# Altium PCB riskybirdv3.PcbDoc
Units mm, origin at the board's own origin, x right, y up, seen from the top; angles counter-clockwise.
Board outline 152.4 x 101.6 mm, 4 copper layers (In2.Cu, F.Cu, B.Cu, In1.Cu); 183 components, 0 nets, 865 pads, 0 vias.
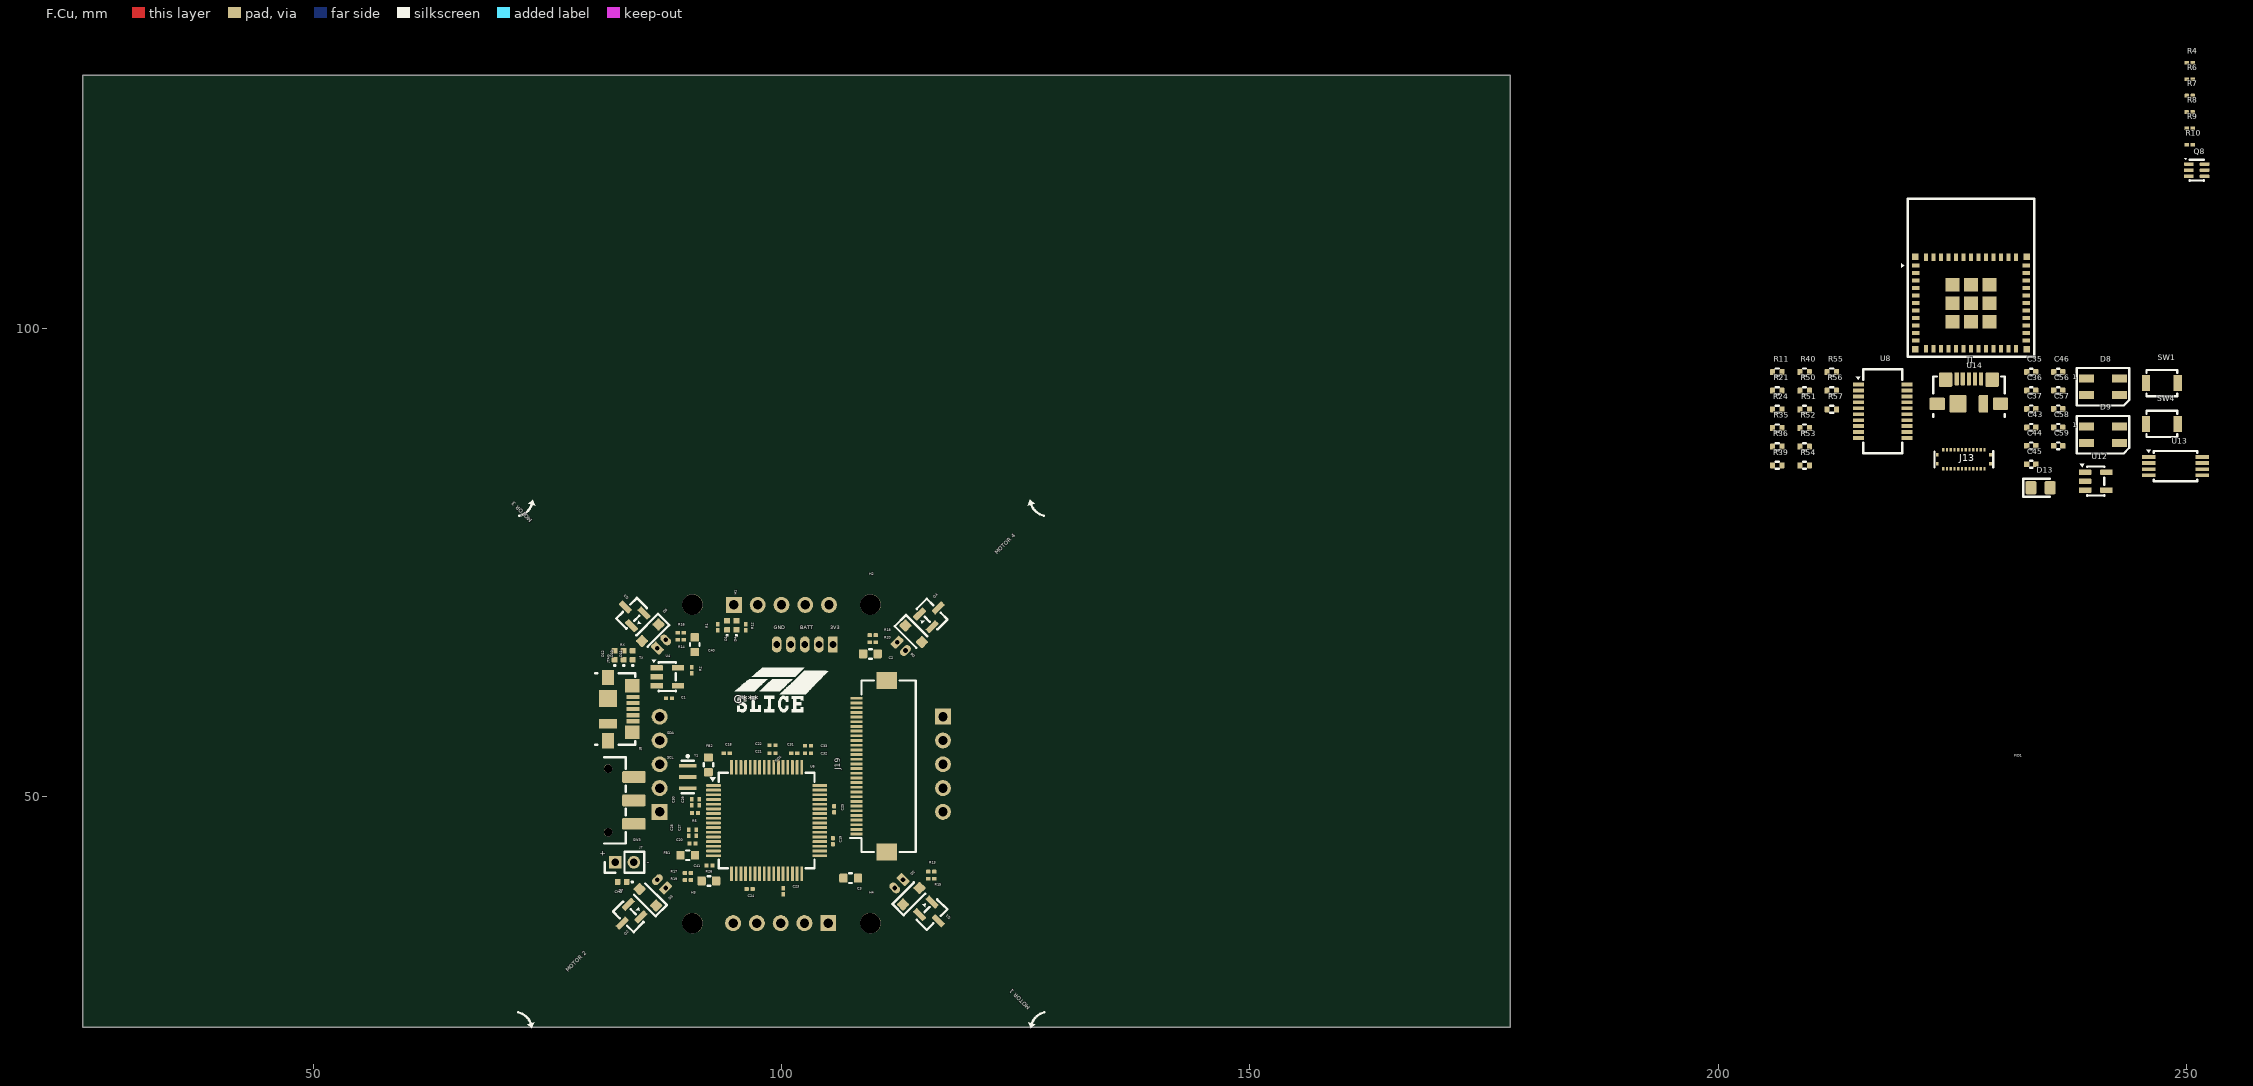
[diagram p0: F.Cu view]
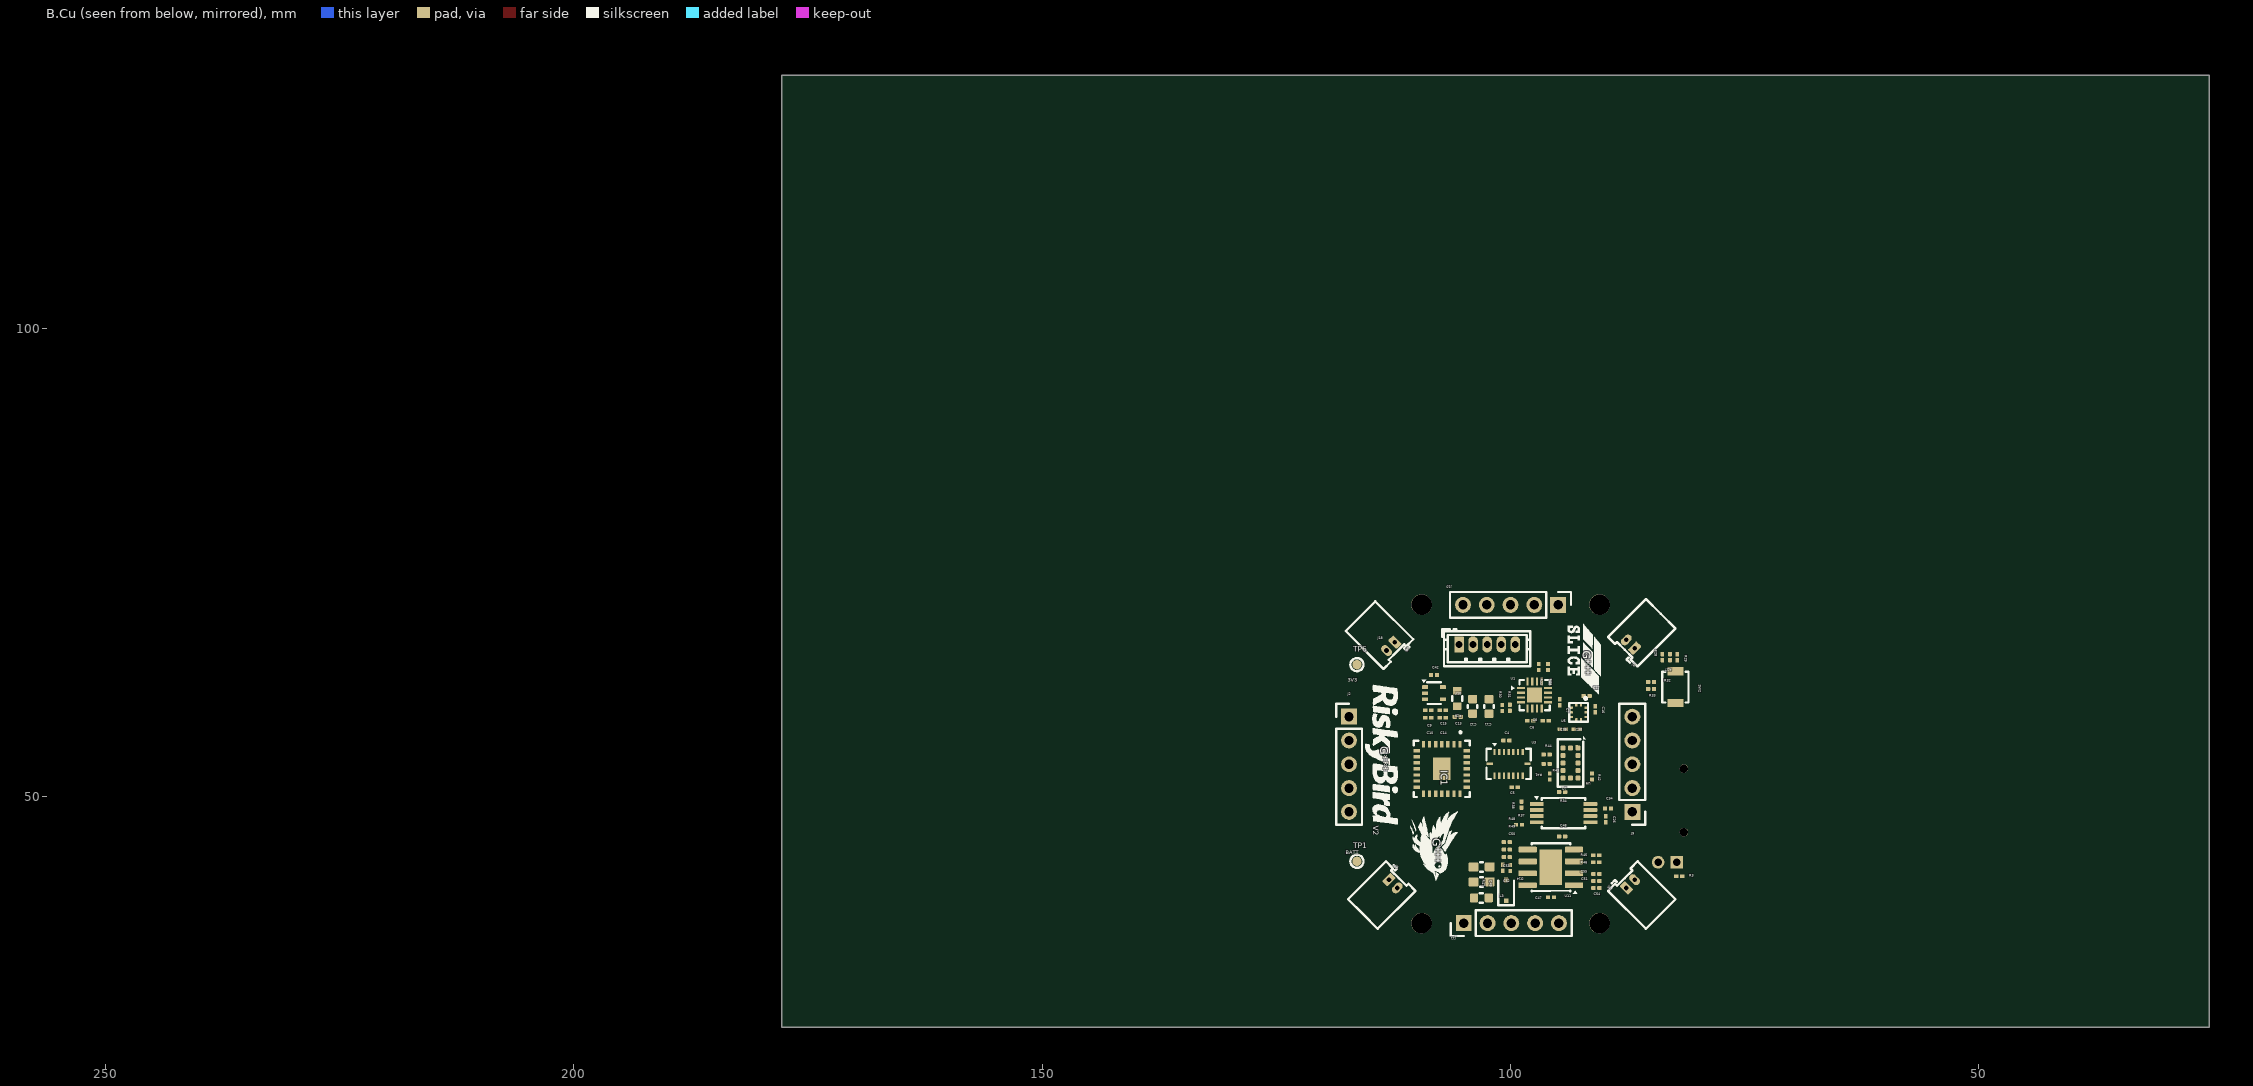
[diagram p1: B.Cu view, seen from below]

## Layer stack, top to bottom
In2.Cu: signal copper 0.0356
Dielectric3: dielectric 0.32, FR-4, Dk 4.8
F.Mask: solder mask 0.0102, Solder Resist, Dk 3.5
F.Cu: signal copper 0.0356
Dielectric 1: dielectric 0.32, FR-4, Dk 4.8
B.Cu: signal copper 0.0356
B.Mask: solder mask 0.0102, Solder Resist, Dk 3.5
In1.Cu: signal copper 0.0356
Dielectric2: dielectric 0.32, FR-4, Dk 4.8

## Board outline
25.4,25.4 177.8,25.4 177.8,127 25.4,127

## Design rules (kind name [scope] priority, off if disabled: settings)
Clearance "Clearence 0.2_NetClass" [InNetClass('Default') OR InNetClass('PWR')] p1: gap=0.2 ignorepadtopadclearanceinfootprint=FALSE
MinimumSolderMaskSliver [All] p1: minsoldermaskwidth=0
PolygonConnect [All] p1: connectstyle=Direct reliefconductorwidth=0.254 reliefentries=4 polygonreliefangle="90 Angle" airgapwidth=0.254
RoutingVias [All] p1: holewidth=0.711 width=1.27 viastyle="Through Hole" minholewidth=0.711 minwidth=1.27 maxholewidth=0.711 maxwidth=1.27
SilkToSilkClearance [All] p1: silktosilkclearance=0
SilkToSolderMaskClearance [IsPad] p1: minsilkscreentomaskgap=0 clearancetoexposedcopper=TRUE
SolderMaskExpansion [All] p1: expansion=0.102 istentingtop=FALSE
Width [All] p1: maxlimit=0.254 minlimit=0.254 preferedwidth=0.254
27 further rules are at their usual default settings.

## Components (designator, comment, footprint, x,y, rotation, side; value= is the part's Value field where it differs from the comment)
C1 "Comment" C_0201_0603Metric#1 88,60.5 r180 top value=4.7u
C2 "Comment" C_0603_1608Metric#1 109.5,65.25 r180 top value=47uF
C3 "Comment" C_0603_1608Metric#1 107.4,41.3 r180 top value=47uF
C4 "Comment" C_0201_0603Metric#2 100.449,56 r0 bottom value=100nF
C5 "Comment" C_0201_0603Metric#2 99.544,51 r0 bottom value=100nF
C6 "Comment" C_0201_0603Metric#2 97.905,58.095 r180 bottom value=100nF
C7 "Comment" C_0201_0603Metric#2 94.75,60.095 r90 bottom value=100nF
C8 "Comment" C_0201_0603Metric#2 96.25,58.095 r0 bottom value=1uF
C9 "Comment" C_0201_0603Metric#2 108.78,59.218 r0 bottom value=4.7uF
C10 "Comment" C_0201_0603Metric#2 108.78,58.418 r0 bottom value=100nF
C11 "Comment" C_0603_1608Metric#2 102.3,59.643 r90 bottom value=22uF
C12 "Comment" C_0603_1608Metric#2 104.05,59.643 r90 bottom value=22uF
C13 "Comment" C_0201_0603Metric#2 105.645,58.518 r0 bottom value=100nF
C14 "Comment" C_0201_0603Metric#2 107.245,58.418 r180 bottom value=10uF
C15 "Comment" C_0201_0603Metric#2 107.245,59.218 r180 bottom value=100nF
C16 "Comment" C_0201_0603Metric#2 90.975,59.345 r90 bottom value=100n
C17 "Comment" C_0201_0603Metric#2 91.88,60.75 r0 bottom value=100n
C18 "Comment" C_0201_0603Metric#1 94.17,54.65 r180 top value=100nF
C19 "Comment" C_0201_0603Metric#1 105.5,45.25 r270 top value=100nF
C20 "Comment" C_0201_0603Metric#1 90.5,45 r180 top value=100nF
C21 "Comment" C_0201_0603Metric#1 99.045,54.65 r0 top value=100nF
C22 "Comment" C_0201_0603Metric#1 99.045,55.5 r0 top value=100nF
C23 "Comment" C_0201_0603Metric#1 100.2,39.9 r90 top value=10uF
C24 "Comment" C_0201_0603Metric#1 96.605,40.15 r0 top value=100nF
C25 "Comment" C_0201_0603Metric#1 105.625,48.65 r90 top value=100nF
C26 "Comment" C_0201_0603Metric#2 89.845,47.595 r90 bottom value=4.7u
C27 "Comment" C_0201_0603Metric#1 90.9,46.155 r270 top value=100nF
C28 "Comment" C_0201_0603Metric#1 90.1,46.155 r270 top value=4.7uF
C29 "Comment" C_0201_0603Metric#1 91.225,49.405 r270 top value=100nF
C30 "Comment" C_0201_0603Metric#1 90.425,49.405 r270 top value=4.7uF
C31 "Comment" C_0201_0603Metric#1 101.37,54.65 r180 top value=100nF
C32 "Comment" C_0201_0603Metric#1 102.845,54.65 r0 top value=3.3uF
C33 "Comment" C_0201_0603Metric#1 102.845,55.45 r0 top value=100nF
C34 "Comment" C_0201_0603Metric#2 89.595,48.75 r0 bottom value=1u
C35 "Comment" C_0402_1005Metric 233.44,95.34 r0 top value=0.1u
C36 "Comment" C_0402_1005Metric 233.44,93.37 r0 top value=4.7u
C37 "Comment" C_0402_1005Metric 233.44,91.4 r0 top value=0.1u
C38 "Comment" C_0201_0603Metric#2 94.416,57.21 r180 bottom value=100nF
C39 "Comment" C_0201_0603Metric#2 92.937,57.21 r180 bottom value=4.7uF
C40 "Comment" C_0603_1608Metric#1 90.75,66.225 r90 top value=47uF
C41 "Comment" C_0603_1608Metric#1 92.25,41 r0 top value=47uF
C42 "Comment" C_0201_0603Metric#2 108.18,63 r180 bottom value=1uF
C43 "Comment" C_0402_1005Metric 233.44,89.43 r0 top value=0.1u
C44 "Comment" C_0402_1005Metric 233.44,87.46 r0 top value=10n
C45 "Comment" C_0402_1005Metric 233.44,85.49 r0 top value=4.7u
C46 "Comment" C_0402_1005Metric 236.31,95.34 r0 top value=10u
C47 "Comment" C_0201_0603Metric#2 95.68,39.25 r180 bottom value=0.1uF
C48 "Comment" C_0201_0603Metric#2 94.5,45.75 r0 bottom value=0.01uF
C49 "Comment" C_0201_0603Metric#2 100.05,42.395 r270 bottom value=1000pF
C50 "Comment" C_0201_0603Metric#2 100.395,43.55 r0 bottom value=47pF
C51 "Comment" C_0201_0603Metric#2 90.845,41 r180 bottom value=4.7uF
C52 "Comment" C_0603_1608Metric_Pad1.08x0.95mm_HandSolder 103.093,40.9 r180 bottom value=47uF
C53 "Comment" C_0603_1608Metric_Pad1.08x0.95mm_HandSolder 103.093,42.5 r180 bottom value=47uF
C54 "Comment" C_0201_0603Metric#2 90.845,40.25 r180 bottom value=0.01uF
C55 "Comment" C_0201_0603Metric#2 90.845,41.75 r180 bottom value=4.7uF
C56 "Comment" C_0402_1005Metric 236.31,93.37 r0 top value=0.1u
C57 "Comment" C_0402_1005Metric 236.31,91.4 r0 top value=4.7u
C58 "Comment" C_0402_1005Metric 236.31,89.43 r0 top value=0.1u
C59 "Comment" C_0402_1005Metric 236.31,87.46 r0 top value=1u
D1 "Comment" LED_0402_1005Metric 94.2,68.3 r90 top value=LED
D2 "Comment" D_SOD-323_HandSoldering 113.866,39.366 r45 top value=BAT54JFILM
D3 "Comment" D_SOD-323_HandSoldering 85.75,39.25 r135 top value=BAT54JFILM
D4 "Comment" LED_0402_1005Metric 95.2,68.3 r90 top value=LED
D5 "Comment" D_SOD-323_HandSoldering 86,67.5 r225 top value=BAT54JFILM
D6 "Comment" D_SOD-323_HandSoldering 114.116,67.384 r315 top value=BAT54JFILM
D7 "Comment" LED_0402_1005Metric 83,40.9 r180 top value=LED_RED
D8 "Comment" LED_SK6812MINI_PLCC4_3.5x3.5mm_P1.75mm 241.105,93.765 r0 top value=SK6812MINI
D9 "Comment" LED_SK6812MINI_PLCC4_3.5x3.5mm_P1.75mm 241.105,88.645 r0 top value=SK6812MINI
D10 "Comment" LED_0402_1005Metric 83.167,65.1 r90 top value=LED
D11 "Comment" LED_0402_1005Metric 84.12,65.1 r90 top value=LED
D12 "Comment" LED_0402_1005Metric 82.2,65.1 r90 top value=LED
D13 "Comment" LED_0805_2012Metric_Pad1.15x1.40mm_HandSolder 234.425,82.985 r0 top value=LED_BLUE
D14 "Comment" D_SOD-323F 100.48,40 r270 bottom value=BAT54J
FB1 "Comment" L_0603_1608Metric#1 90,43.75 r0 top value=600R@100MHz/0.5A
FB2 "Comment" L_0603_1608Metric#1 92.2,53.4 r90 top value=600R@100MHz/0.5A
FID1 "Comment" riskybird_frame 231.85,53.8 r0 top value=DroneFrame
FID1 "Comment" riskybird_frame 100,53.5 r45 top value=DroneFrame
G*** "Comment" LOGO 92.2,64.7 r90 bottom value=LOGO
G*** "Comment" LOGO 113.8,54.5 r90 bottom value=LOGO
G*** "Comment" LOGO 108.2,44.7 r90 bottom value=LOGO
G*** "Comment" LOGO 100,61.3 r0 top value=LOGO
H1 "Comment" MountingHole_2.2mm_M2 90.5,70.5 r0 top value=MountingHole
H2 "Comment" MountingHole_2.2mm_M2 109.5,70.5 r0 top value=MountingHole
H3 "Comment" MountingHole_2.2mm_M2 90.5,36.5 r0 top value=MountingHole
H4 "Comment" MountingHole_2.2mm_M2 109.5,36.5 r0 top value=MountingHole
IC1 "Comment" PMW3901MBTXQT 107.35,52.968 r90 bottom value=PMW3901MB-TXQT
J1 "Comment" USB_Micro-B_Molex_47346-0001#1 226.78,93.15 r0 top value=USB_B_Micro
J2 "Comment" PinHeader_1x05_P2.54mm_Vertical 117.25,58.54 r0 bottom value=Conn_01x05
J3 "Comment" Molex_PicoBlade_53048-0210_1x02_P1.25mm_Horizontal 112.99,41.144 r45 bottom value=Conn_01x02
J4 "Comment" Molex_PicoBlade_53048-0210_1x02_P1.25mm_Horizontal 86.76,65.856 r225 bottom value=Conn_01x02
J5 "Comment" Molex_PicoBlade_53048-0210_1x02_P1.25mm_Horizontal 87.644,40.26 r315 bottom value=Conn_01x02
J6 "Comment" Molex_PicoBlade_53048-0210_1x02_P1.25mm_Horizontal 112.356,66.49 r135 bottom value=Conn_01x02
J7 "Comment" PinHeader_1x02_P2.00mm_Vertical 82.25,43 r90 top value=Conn_01x02
J8 "Comment" USB_Micro-B_Molex_47346-0001#2 82.7,59.35 r270 top value=USB_B_Micro
J9 "Comment" PinHeader_1x05_P2.54mm_Vertical 87,48.38 r180 bottom value=Conn_01x05
J10 "Comment" PinHeader_1x05_P2.54mm_Vertical 94.925,70.474 r90 bottom value=Conn_01x05
J11 "Comment" PinHeader_1x05_P2.54mm_Vertical 105,36.5 r270 bottom value=Conn_01x05
J13 "Comment" 5037762410 226.24,86.025 r0 top value=Conn_02x12_Odd_Even_MountingPin
J18 "Comment" JST_ZH_B5B-ZR_1x05_P1.50mm_Vertical 105.5,66.25 r0 bottom value=Conn_01x05_MountingPin
J19 "Comment" Hirose_FH12-30S-0.5SH_1x30-1MP_P0.50mm_Horizontal 109.85,53.25 r90 top value=Conn_01x30_MountingPin
L3 "Comment" L_0603_1608Metric#2 103.11,39.2 r180 bottom value=6.8uH
Q1 "Comment" SOT-23 116.087,37.413 r315 top value=SI2302
Q2 "Comment" SOT-23 83.663,37.163 r225 top value=SI2302
Q3 "Comment" SOT-23 84.009,69.585 r135 top value=SI2302
Q4 "Comment" SOT-23 116.085,69.491 r45 top value=SI2302
Q8 "Comment" SOT-363_SC-70-6 251.1,116.885 r0 top value=BC847BDW1
R1 "Comment" R_0201_0603Metric#1 93.2,68.1 r90 top value=150
R2 "Comment" R_0201_0603Metric#1 90.436,63.5 r270 top value=2k
R3 "Comment" R_0201_0603Metric#2 82,41.5 r180 bottom value=150
R4 "Comment" R_0201_0603Metric#1 250.35,128.35 r0 top value=10k
R5 "Comment" R_0201_0603Metric#1 90.77,48.25 r180 top value=12k
R6 "Comment" R_0201_0603Metric#1 250.35,126.6 r0 top value=10k
R7 "Comment" R_0201_0603Metric#1 250.35,124.85 r0 top value=10k
R8 "Comment" R_0201_0603Metric#1 250.35,123.1 r0 top value=10k
R9 "Comment" R_0201_0603Metric#1 250.35,121.35 r0 top value=10k
R10 "Comment" R_0201_0603Metric#1 250.35,119.6 r0 top value=10k
R11 "Comment" R_0402_1005Metric 206.33,95.33 r0 top value=10k
R12 "Comment" R_0201_0603Metric#1 96.2,68.1 r90 top value=150
R13 "Comment" R_0201_0603Metric#1 116,42 r0 top value=47R
R14 "Comment" R_0201_0603Metric#1 89.25,66.75 r180 top value=47R
R15 "Comment" R_0201_0603Metric#1 116,41.25 r180 top value=10k
R16 "Comment" R_0201_0603Metric#1 89.25,67.5 r0 top value=10k
R17 "Comment" R_0201_0603Metric#1 90.011,41.857 r180 top value=47R
R18 "Comment" R_0201_0603Metric#1 109.75,66.5 r0 top value=47R
R19 "Comment" R_0201_0603Metric#1 90.011,41.107 r0 top value=10k
R20 "Comment" R_0201_0603Metric#1 109.75,67.25 r180 top value=10k
R21 "Comment" R_0402_1005Metric 206.33,93.34 r0 top value=27
R22 "Comment" R_0201_0603Metric#2 97,63.845 r90 bottom value=4.7K
R23 "Comment" R_0201_0603Metric#2 96,63.845 r90 bottom value=4.7K
R24 "Comment" R_0402_1005Metric 206.33,91.35 r0 top value=27
R25 "Comment" R_0603_1608Metric 105.7,60.493 r90 bottom value=3
R26 "Comment" R_0201_0603Metric#1 92.325,42.65 r180 top value=1k
R27 "Comment" R_0201_0603Metric#2 82.977,64.9 r270 bottom value=150
R28 "Comment" R_0201_0603Metric#2 83.8,64.9 r270 bottom value=150
R29 "Comment" R_0201_0603Metric#2 82.2,64.9 r270 bottom value=150
R30 "Comment" R_0201_0603Metric#2 100.888,59.471 r270 bottom value=200K
R31 "Comment" R_0201_0603Metric#2 100.074,59.486 r90 bottom value=100K
R32 "Comment" R_0201_0603Metric#2 85,62.25 r0 bottom value=10K
R33 "Comment" R_0201_0603Metric#2 85,61.5 r180 bottom value=100
R34 "Comment" R_0201_0603Metric#2 94.5,50.5 r180 bottom value=10k
R35 "Comment" R_0402_1005Metric 206.33,89.36 r0 top value=10k
R36 "Comment" R_0402_1005Metric 206.33,87.37 r0 top value=10k
R37 "Comment" R_0201_0603Metric#2 99.095,47 r180 bottom value=150
R38 "Comment" R_0201_0603Metric#2 98.845,49.155 r90 bottom value=10k
R39 "Comment" R_0402_1005Metric 206.33,85.38 r0 top value=10k
R40 "Comment" R_0402_1005Metric 209.24,95.33 r0 top value=10k
R41 "Comment" R_0201_0603Metric#2 95.81,52.155 r90 bottom value=10k
R42 "Comment" R_0201_0603Metric#2 91.31,52.155 r90 bottom value=10k
R43 "Comment" R_0201_0603Metric#2 96.155,53.5 r0 bottom value=4.7K
R44 "Comment" R_0201_0603Metric#2 96.155,54.5 r0 bottom value=4.7K
R45 "Comment" R_0201_0603Metric#2 90.845,43.75 r0 bottom value=68.1k
R46 "Comment" R_0201_0603Metric#2 90.845,43 r180 bottom value=332k
R47 "Comment" R_0201_0603Metric#2 100.85,42.405 r90 bottom value=29.4k
R48 "Comment" R_0201_0603Metric#2 100.395,45.15 r0 bottom value=10.2k
R49 "Comment" R_0201_0603Metric#2 100.395,44.35 r180 bottom value=3.24k
R50 "Comment" R_0402_1005Metric 209.24,93.34 r0 top value=150
R51 "Comment" R_0402_1005Metric 209.24,91.35 r0 top value=200k
R52 "Comment" R_0402_1005Metric 209.24,89.36 r0 top value=100k
R53 "Comment" R_0402_1005Metric 209.24,87.37 r0 top value=10k
R54 "Comment" R_0402_1005Metric 209.24,85.38 r0 top value=150
R55 "Comment" R_0402_1005Metric 212.15,95.33 r0 top value=10k
R56 "Comment" R_0402_1005Metric 212.15,93.34 r0 top value=4.7k
R57 "Comment" R_0402_1005Metric 212.15,91.35 r0 top value=4.7k
SW1 "Comment" SW_SPST_B3U-1000P#1 247.39,94.15 r0 top value=SW_SPST
SW2 "Comment" SW_SPST_B3U-1000P#2 82.4,61.7 r90 bottom value=SW_SPST
SW3 "Comment" SW_SPDT_CK_JS102011SAQN 81.5,49.6 r270 top value=SW_SPST
SW4 "Comment" SW_SPST_B3U-1000P#1 247.39,89.8 r0 top value=SW_SPST
TP1 "Comment" TestPoint_Pad_D1.0mm 116.4,43.1 r0 bottom value=TestPoint
TP6 "Comment" TestPoint_Pad_D1.0mm 116.4,64.1 r0 bottom value=TestPoint
U1 "Comment" WQFN-16-1EP_3x3mm_P0.5mm_EP1.6x1.6mm 97.437,60.845 r0 bottom value=ADS7128IRTER
U3 "Comment" Bosch_LGA-16_4.5x3mm_P0.5mm_LayoutBorder7x1y_ClockwisePinNumbering 100.211,53.5 r0 bottom value=BMI088
U4 "Comment" SOT-23-5 87.823,62.8 r0 top value=MCP73831-2-OT
U5 "Comment" BMP390 92.738,59 r0 bottom value=~
U6 "Comment" LQFP-64_10x10mm_P0.5mm 98.425,47.45 r0 top value=FT2232HL-REEL
U7 "Comment" TSSOP-8_4.4x3mm_P0.65mm#1 94.345,48.25 r0 bottom value=TPS2113A
U8 "Comment" SSOP-20_3.9x8.7mm_P0.635mm 217.58,91.15 r0 top value=FT231XS
U9 "Comment" ST_VL53L1x 93.61,53.6 r90 bottom value=VL53L1CXV0FY1
U10 "Comment" SOT-353_SC-70-5 108.175,61.05 r0 bottom value=TLV70018DCKR
U11 "Comment" SOIC-8-1EP_3.9x4.9mm_P1.27mm_EP2.41x3.81mm 95.7,42.45 r180 bottom value=TPS54331D
U12 "Comment" SOT-23-5 240.32,83.685 r0 top value=LP2985-3.0
U13 "Comment" TSSOP-8_4.4x3mm_P0.65mm#2 248.84,85.295 r0 top value=TPS2113A
U14 "Comment" ESP32-C6-MINI-1 227,102.7 r0 top value=ESP32-C6-MINI-1/U
Y1 "Comment" OSC_CSTNE12M0G550000R0 90,52.1 r270 top value=f

## Footprints (in the part's own frame and the unit in brackets; to place one, negate y for a bottom-side part, rotate by r counter-clockwise, add the part's x,y. Pads: shape width x height; smd on the part's side, far side on the other; paste and mask are expansions set on the pad)
5037762410 [mm]
  rect 0.24x0.35 smd mask+0.051: 1(-2.2,-1.025) 2(-2.2,1.025) 3(-1.8,-1.025) 4(-1.8,1.025) 5(-1.4,-1.025) 6(-1.4,1.025) 7(-1,-1.025) 8(-1,1.025) 9(-0.6,-1.025) 10(-0.6,1.025) 11(-0.2,-1.025) 12(-0.2,1.025) 13(0.2,-1.025) 14(0.2,1.025) 15(0.6,-1.025) 16(0.6,1.025) 17(1,-1.025) 18(1,1.025) 19(1.4,-1.025) 20(1.4,1.025) 21(1.8,-1.025) 22(1.8,1.025) 23(2.2,-1.025) 24(2.2,1.025)
  rect 0.3x0.42 smd mask+0.051: MP1(-2.83,-0.48) MP2(2.83,-0.48) MP3(2.83,0.48) MP4(-2.83,0.48)
  silkscreen extent -3.14,-0.85 3.14,0.85
BMP390 [mm]
  rrect25% 0.25x0.275 smd mask+0.051: 1(-0.25,-0.763) 2(0.25,-0.763) 6(0.25,0.763) 7(-0.25,0.763)
  rrect25% 0.275x0.25 smd mask+0.051: 3(0.763,-0.5) 4(0.763,0) 5(0.763,0.5) 8(-0.763,0.5) 9(-0.763,0) 10(-0.763,-0.5)
  silkscreen extent -1,-1.63 1,1
Bosch_LGA-16_4.5x3mm_P0.5mm_LayoutBorder7x1y_ClockwisePinNumbering [mm]
  rrect25% 0.25x0.675 smd mask+0.051: 1(1.5,-1.262) 2(1,-1.262) 3(0.5,-1.262) 4(0,-1.262) 5(-0.5,-1.262) 6(-1,-1.262) 7(-1.5,-1.262) 9(-1.5,1.262) 10(-1,1.262) 11(-0.5,1.262) 12(0,1.262) 13(0.5,1.262) 14(1,1.262) 15(1.5,1.262)
  rrect25% 0.675x0.25 smd mask+0.051: 8(-2.013,0) 16(2.013,0)
  silkscreen extent -2.36,-2.19 2.36,1.61
C_0201_0603Metric#1 [mm]
  rrect25% 0.46x0.4 smd paste-0.46 mask+0.051: 1(-0.32,0) 2(0.32,0)
  rrect25% 0.318x0.36 on Top Paste mask-0.36: Un1(-0.345,0) Un2(0.345,0)
C_0201_0603Metric#2 [mm]
  rrect25% 0.46x0.4 smd paste-0.46 mask+0.051: 1(0.32,0) 2(-0.32,0)
  rrect25% 0.318x0.36 on Bottom Paste mask-0.36: Un1(0.345,0) Un2(-0.345,0)
C_0402_1005Metric [mm]
  rrect25% 0.56x0.62 smd mask+0.051: 1(-0.48,0) 2(0.48,0)
  silkscreen extent -0.11,-0.36 0.11,0.36
C_0603_1608Metric#1 [mm]
  rrect25% 0.9x0.95 smd mask+0.051: 1(-0.775,0) 2(0.775,0)
  silkscreen extent -0.14,-0.51 0.14,0.51
C_0603_1608Metric#2 [mm]
  rrect25% 0.9x0.95 smd mask+0.051: 1(0.775,0) 2(-0.775,0)
  silkscreen extent -0.14,-0.51 0.14,0.51
C_0603_1608Metric_Pad1.08x0.95mm_HandSolder [mm]
  rrect25% 1.075x0.95 smd mask+0.051: 1(0.863,0) 2(-0.863,0)
  silkscreen extent -0.15,-0.51 0.15,0.51
D_SOD-323_HandSoldering [mm]
  rrect25% 1x1 smd mask+0.051: 1(-1.25,0) 2(1.25,0)
  silkscreen extent -2.01,-0.85 1.25,0.85
D_SOD-323F [mm]
  rrect25% 0.5x0.5 smd mask+0.051: 1(1.1,0) 2(-1.1,0)
  silkscreen extent -1.05,-0.85 1.61,0.85
ESP32-C6-MINI-1 [mm]
  rect 0.8x0.4 smd mask+0.051: 1(-5.9,4) 2(-5.9,3.2) 3(-5.9,2.4) 4(-5.9,1.6) 5(-5.9,0.8) 6(-5.9,0) 7(-5.9,-0.8) 8(-5.9,-1.6) 9(-5.9,-2.4) 10(-5.9,-3.2) 11(-5.9,-4) 25(5.9,-4) 26(5.9,-3.2) 27(5.9,-2.4) 28(5.9,-1.6) 29(5.9,-0.8) 30(5.9,0) 31(5.9,0.8) 32(5.9,1.6) 33(5.9,2.4) 34(5.9,3.2) 35(5.9,4)
  rect 0.4x0.8 smd mask+0.051: 12(-4.8,-4.9) 13(-4,-4.9) 14(-3.2,-4.9) 15(-2.4,-4.9) 16(-1.6,-4.9) 17(-0.8,-4.9) 18(0,-4.9) 19(0.8,-4.9) 20(1.6,-4.9) 21(2.4,-4.9) 22(3.2,-4.9) 23(4,-4.9) 24(4.8,-4.9) 36(4.8,4.9) 37(4,4.9) 38(3.2,4.9) 39(2.4,4.9) 40(1.6,4.9) 41(0.8,4.9) 42(0,4.9) 43(-0.8,4.9) 44(-1.6,4.9) 45(-2.4,4.9) 46(-3.2,4.9) 47(-4,4.9) 48(-4.8,4.9)
  rect 1.45x1.45 smd mask+0.051: 49(-1.975,-1.975) 49(-1.975,0) 49(0,-1.975) 49(0,0) 49(0,1.975) 49(1.975,-1.975) 49(1.975,0) 49(1.975,1.975)
  rrect0% 1.45x1.45 smd mask+0.051: 49(-1.975,1.975)
  rect 0.7x0.7 smd mask+0.051: 50(5.95,4.95) 51(5.95,-4.95) 52(-5.95,-4.95) 53(-5.95,4.95)
  silkscreen extent -7.44,-5.75 6.75,11.15
Hirose_FH12-30S-0.5SH_1x30-1MP_P0.50mm_Horizontal [mm]
  rect 0.3x1.3 smd mask+0.051: 1(-7.25,1.85) 2(-6.75,1.85) 3(-6.25,1.85) 4(-5.75,1.85) 5(-5.25,1.85) 6(-4.75,1.85) 7(-4.25,1.85) 8(-3.75,1.85) 9(-3.25,1.85) 10(-2.75,1.85) 11(-2.25,1.85) 12(-1.75,1.85) 13(-1.25,1.85) 14(-0.75,1.85) 15(-0.25,1.85) 16(0.25,1.85) 17(0.75,1.85) 18(1.25,1.85) 19(1.75,1.85) 20(2.25,1.85) 21(2.75,1.85) 22(3.25,1.85) 23(3.75,1.85) 24(4.25,1.85) 25(4.75,1.85) 26(5.25,1.85) 27(5.75,1.85) 28(6.25,1.85) 29(6.75,1.85) 30(7.25,1.85)
  rect 1.8x2.2 smd mask+0.051: MP(-9.15,-1.4) MP(9.15,-1.4)
  silkscreen extent -9.15,-4.5 9.15,2.5
JST_ZH_B5B-ZR_1x05_P1.50mm_Vertical [mm]
  rrect24% 1.03x1.73 hole 0.73 mask+0.051: 1(0,0)
  rrect100% 1.03x1.73 hole 0.73 mask+0.051: 2(-1.5,0) 3(-3,0) 4(-4.5,0) 5(-6,0)
  silkscreen extent -7.61,-1.61 1.81,2.31
L_0603_1608Metric#1 [mm]
  rrect25% 0.875x0.95 smd mask+0.051: 1(-0.787,0) 2(0.787,0)
  silkscreen extent -0.16,-0.51 0.16,0.51
L_0603_1608Metric#2 [mm]
  rrect25% 0.875x0.95 smd mask+0.051: 1(0.787,0) 2(-0.787,0)
  silkscreen extent -0.16,-0.51 0.16,0.51
LED_0402_1005Metric [mm]
  rrect25% 0.59x0.64 smd mask+0.051: 1(-0.485,0) 2(0.485,0)
  silkscreen extent -1.14,-0.05 -1.04,0.05
LED_0805_2012Metric_Pad1.15x1.40mm_HandSolder [mm]
  rrect22% 1.15x1.4 smd mask+0.051: 1(-1.025,0) 2(1.025,0)
  silkscreen extent -1.86,-0.96 1,0.96
LED_SK6812MINI_PLCC4_3.5x3.5mm_P1.75mm [mm]
  rect 1.6x0.85 smd mask+0.051: 1(-1.75,0.875) 2(-1.75,-0.875) 3(1.75,-0.875) 4(1.75,0.875)
  silkscreen extent -2.8,-2 2.8,2
LOGO [mm]
  silkscreen extent -3.75,-1.83 3.75,1.71
LQFP-64_10x10mm_P0.5mm [mm]
  rrect25% 1.55x0.3 smd mask+0.051: 1(-5.675,3.75) 2(-5.675,3.25) 3(-5.675,2.75) 4(-5.675,2.25) 5(-5.675,1.75) 6(-5.675,1.25) 7(-5.675,0.75) 8(-5.675,0.25) 9(-5.675,-0.25) 10(-5.675,-0.75) 11(-5.675,-1.25) 12(-5.675,-1.75) 13(-5.675,-2.25) 14(-5.675,-2.75) 15(-5.675,-3.25) 16(-5.675,-3.75) 33(5.675,-3.75) 34(5.675,-3.25) 35(5.675,-2.75) 36(5.675,-2.25) 37(5.675,-1.75) 38(5.675,-1.25) 39(5.675,-0.75) 40(5.675,-0.25) 41(5.675,0.25) 42(5.675,0.75) 43(5.675,1.25) 44(5.675,1.75) 45(5.675,2.25) 46(5.675,2.75) 47(5.675,3.25) 48(5.675,3.75)
  rrect25% 0.3x1.55 smd mask+0.051: 17(-3.75,-5.675) 18(-3.25,-5.675) 19(-2.75,-5.675) 20(-2.25,-5.675) 21(-1.75,-5.675) 22(-1.25,-5.675) 23(-0.75,-5.675) 24(-0.25,-5.675) 25(0.25,-5.675) 26(0.75,-5.675) 27(1.25,-5.675) 28(1.75,-5.675) 29(2.25,-5.675) 30(2.75,-5.675) 31(3.25,-5.675) 32(3.75,-5.675) 49(3.75,5.675) 50(3.25,5.675) 51(2.75,5.675) 52(2.25,5.675) 53(1.75,5.675) 54(1.25,5.675) 55(0.75,5.675) 56(0.25,5.675) 57(-0.25,5.675) 58(-0.75,5.675) 59(-1.25,5.675) 60(-1.75,5.675) 61(-2.25,5.675) 62(-2.75,5.675) 63(-3.25,5.675) 64(-3.75,5.675)
  silkscreen extent -6.09,-5.11 5.11,5.11
Molex_PicoBlade_53048-0210_1x02_P1.25mm_Horizontal [mm]
  rrect25% 0.8x1.3 hole 0.5 mask+0.051: 1(0,0)
  rrect100% 0.8x1.3 hole 0.5 mask+0.051: 2(-1.25,0)
  silkscreen extent -2.86,-1.45 1.61,4.56
MountingHole_2.2mm_M2 [mm]
  round 2.2 hole 2.2 mask+0.051: Un1(0,0)
OSC_CSTNE12M0G550000R0 [mm]
  rect 0.4x1.9 smd mask+0.102: 1(-1.2,0) 2(0,0) 3(1.2,0)
  silkscreen extent -2.32,-0.65 1.72,0.65
PinHeader_1x02_P2.00mm_Vertical [mm]
  rect 1.35x1.35 hole 0.8 mask+0.051: 1(0,0)
  round 1.35 hole 0.8 mask+0.051: 2(0,-2)
  silkscreen extent -1.11,-3.11 1.11,1.11
PinHeader_1x05_P2.54mm_Vertical [mm]
  rect 1.7x1.7 hole 1 mask+0.051: 1(0,0)
  round 1.7 hole 1 mask+0.051: 2(0,2.54) 3(0,5.08) 4(0,7.62) 5(0,10.16)
  silkscreen extent -1.38,-1.38 1.38,11.54
PMW3901MBTXQT [mm]
  rect 0.7x0.35 smd mask+0.051: 1(2.65,-1.95) 2(2.65,-1.3) 3(2.65,-0.65) 4(2.65,0) 5(2.65,0.65) 6(2.65,1.3) 7(2.65,1.95) 15(-2.65,1.95) 16(-2.65,1.3) 17(-2.65,0.65) 18(-2.65,0) 19(-2.65,-0.65) 20(-2.65,-1.3) 21(-2.65,-1.95)
  rect 0.35x0.7 smd mask+0.051: 8(1.95,2.65) 9(1.3,2.65) 10(0.65,2.65) 11(0,2.65) 12(-0.65,2.65) 13(-1.3,2.65) 14(-1.95,2.65) 22(-1.95,-2.65) 23(-1.3,-2.65) 24(-0.65,-2.65) 25(0,-2.65) 26(0.65,-2.65) 27(1.3,-2.65) 28(1.95,-2.65)
  rect 2.4x1.9 smd mask+0.051: 29(0,0)
  silkscreen extent -3,-3 4,3
R_0201_0603Metric#1 [mm]
  rrect25% 0.46x0.4 smd paste-0.46 mask+0.051: 1(-0.32,0) 2(0.32,0)
  rrect25% 0.318x0.36 on Top Paste mask-0.36: Un1(-0.345,0) Un2(0.345,0)
R_0201_0603Metric#2 [mm]
  rrect25% 0.46x0.4 smd paste-0.46 mask+0.051: 1(0.32,0) 2(-0.32,0)
  rrect25% 0.318x0.36 on Bottom Paste mask-0.36: Un1(0.345,0) Un2(-0.345,0)
R_0402_1005Metric [mm]
  rrect25% 0.54x0.64 smd mask+0.051: 1(-0.51,0) 2(0.51,0)
  silkscreen extent -0.15,-0.38 0.15,0.38
R_0603_1608Metric [mm]
  rrect25% 0.8x0.95 smd mask+0.051: 1(0.825,0) 2(-0.825,0)
  silkscreen extent -0.24,-0.52 0.24,0.52
riskybird_frame [mm]
SOIC-8-1EP_3.9x4.9mm_P1.27mm_EP2.41x3.81mm [mm]
  rrect25% 1.95x0.6 smd mask+0.051: 1(2.475,-1.905) 2(2.475,-0.635) 3(2.475,0.635) 4(2.475,1.905) 5(-2.475,1.905) 6(-2.475,0.635) 7(-2.475,-0.635) 8(-2.475,-1.905)
  rect 2.41x3.81 smd paste-3.81 mask+0.051: 9(0,0)
  rrect25% 0.97x1.54 on Bottom Paste mask-1.54: Un1(0.6,0.95) Un2(0.6,-0.95) Un3(-0.6,0.95) Un4(-0.6,-0.95)
  silkscreen extent -2.06,-2.8 2.84,2.56
SOT-23 [mm]
  rrect25% 1.475x0.6 smd mask+0.051: 1(-0.937,0.95) 2(-0.937,-0.95) 3(0.938,0)
  silkscreen extent -1.54,-1.56 0.76,1.56
SOT-23-5 [mm]
  rrect25% 1.325x0.6 smd mask+0.051: 1(-1.138,0.95) 2(-1.138,0) 3(-1.138,-0.95) 4(1.138,-0.95) 5(1.138,0.95)
  silkscreen extent -1.69,-1.56 0.91,1.84
SOT-353_SC-70-5 [mm]
  rrect25% 0.65x0.4 smd mask+0.051: 1(0.95,-0.65) 2(0.95,0) 3(0.95,0.65) 4(-0.95,0.65) 5(-0.95,-0.65)
  silkscreen extent -0.7,-1.44 1.32,1.16
SOT-363_SC-70-6 [mm]
  rrect25% 1.025x0.35 smd mask+0.051: 1(-0.837,0.65) 2(-0.837,0) 3(-0.837,-0.65) 4(0.837,-0.65) 5(0.837,0) 6(0.837,0.65)
  silkscreen extent -1.32,-1.11 0.73,1.28
SSOP-20_3.9x8.7mm_P0.635mm [mm]
  rect 1.2x0.4 smd mask+0.051: 1(-2.6,2.857) 2(-2.6,2.222) 3(-2.6,1.587) 4(-2.6,0.953) 5(-2.6,0.318) 6(-2.6,-0.318) 7(-2.6,-0.953) 8(-2.6,-1.587) 9(-2.6,-2.222) 10(-2.6,-2.857) 11(2.6,-2.857) 12(2.6,-2.222) 13(2.6,-1.587) 14(2.6,-0.953) 15(2.6,-0.318) 16(2.6,0.318) 17(2.6,0.953) 18(2.6,1.587) 19(2.6,2.222) 20(2.6,2.857)
  silkscreen extent -2.88,-4.47 2.07,4.47
ST_VL53L1x [mm]
  rrect25% 0.5x0.5 smd mask+0.051: 1(1.6,-0.8) 2(0.8,-0.8) 3(0,-0.8) 4(-0.8,-0.8) 5(-1.6,-0.8) 6(-1.6,0) 7(-1.6,0.8) 8(-0.8,0.8) 9(0,0.8) 10(0.8,0.8) 11(1.6,0.8) 12(1.6,0)
  rrect25% 0.38x0.25 smd mask+0.051: 1(1.74,-0.675)
  silkscreen extent -2.55,-1.63 2.83,1.35
SW_SPDT_CK_JS102011SAQN [mm]
  rrect20% 1.25x2.5 smd mask+0.051: 1(-2.5,2.75) 2(0,2.75) 3(2.5,2.75)
  round 0.9 hole 0.9 mask+0.051: Un1(-3.4,0) Un2(3.4,0)
  silkscreen extent -4.6,-0.4 4.6,1.9
SW_SPST_B3U-1000P#1 [mm]
  rect 0.9x1.7 smd mask+0.051: 1(-1.7,0) 2(1.7,0)
  silkscreen extent -1.65,-1.4 1.65,1.4
SW_SPST_B3U-1000P#2 [mm]
  rect 0.9x1.7 smd mask+0.051: 1(1.7,0) 2(-1.7,0)
  silkscreen extent -1.65,-1.4 1.65,1.4
TestPoint_Pad_D1.0mm [mm]
  round 1 smd paste-1 mask+0.051: 1(0,0)
  silkscreen extent -0.7,-0.7 0.7,0.7
TSSOP-8_4.4x3mm_P0.65mm#1 [mm]
  rrect25% 1.475x0.4 smd mask+0.051: 1(2.863,-0.975) 2(2.863,-0.325) 3(2.863,0.325) 4(2.863,0.975) 5(-2.863,0.975) 6(-2.863,0.325) 7(-2.863,-0.325) 8(-2.863,-0.975)
  silkscreen extent -2.31,-1.77 3.11,1.61
TSSOP-8_4.4x3mm_P0.65mm#2 [mm]
  rrect25% 1.475x0.4 smd mask+0.051: 1(-2.863,0.975) 2(-2.863,0.325) 3(-2.863,-0.325) 4(-2.863,-0.975) 5(2.863,-0.975) 6(2.863,-0.325) 7(2.863,0.325) 8(2.863,0.975)
  silkscreen extent -3.11,-1.61 2.31,1.77
USB_Micro-B_Molex_47346-0001#1 [mm]
  rrect25% 0.45x1.38 smd mask+0.051: 1(-1.3,1.46) 2(-0.65,1.46) 3(0,1.46) 4(0.65,1.46) 5(1.3,1.46)
  rrect19% 1.65x1.3 smd mask+0.051: SH(-3.375,-1.2) SH(3.375,-1.2)
  rrect18% 1.425x1.55 smd mask+0.051: SH(-2.488,1.375) SH(2.488,1.375)
  rrect14% 1.8x1.9 smd mask+0.051: SH(-1.15,-1.2)
  rrect25% 1x1.9 smd mask+0.051: SH(1.55,-1.2)
  silkscreen extent -3.81,-2.6 3.81,1.71
USB_Micro-B_Molex_47346-0001#2 [mm]
  rect 0.45x1.38 smd mask+0.051: 1(-1.3,1.46) 2(-0.65,1.46) 3(0,1.46) 4(0.65,1.46) 5(1.3,1.46)
  rect 1.65x1.3 smd mask+0.051: 6(-3.375,-1.2) 6(3.375,-1.2)
  rect 1.425x1.55 smd mask+0.051: 6(-2.488,1.375) 6(2.488,1.375)
  rect 1.8x1.9 smd mask+0.051: 6(-1.15,-1.2)
  rect 1x1.9 smd mask+0.051: 6(1.55,-1.2)
  silkscreen extent -3.81,-2.6 3.81,1.71
WQFN-16-1EP_3x3mm_P0.5mm_EP1.6x1.6mm [mm]
  rrect25% 0.875x0.25 smd mask+0.051: 1(1.438,-0.75) 2(1.438,-0.25) 3(1.438,0.25) 4(1.438,0.75) 9(-1.438,0.75) 10(-1.438,0.25) 11(-1.438,-0.25) 12(-1.438,-0.75)
  rrect25% 0.25x0.875 smd mask+0.051: 5(0.75,1.438) 6(0.25,1.438) 7(-0.25,1.438) 8(-0.75,1.438) 13(-0.75,-1.438) 14(-0.25,-1.438) 15(0.25,-1.438) 16(0.75,-1.438)
  rect 1.6x1.6 smd paste-1.6 mask+0.051: 17(0,0)
  rrect25% 0.64x0.64 on Bottom Paste mask-0.64: Un1(0.4,0.4) Un2(0.4,-0.4) Un3(-0.4,0.4) Un4(-0.4,-0.4)
  silkscreen extent -1.61,-1.61 2.47,1.61

## Part data
C1 C4 C5 C6 C7 C8 C9 C10 C13 C14 C15 C16 C17 C18 C19 C20 C21 C22 C23 C24 C25 C26 C27 C28 C29 C30 C31 C32 C33 C34 C38 C39 C42 C47 C48 C49 C50 C51 C54 C55: library part C_0201_0603Metric, "Capacitor SMD 0201 (0603 Metric), square (rectangular) end terminal, IPC-7351 nominal, (Body size source: https://www.vishay.com/docs/20052/crcw0201e3.pdf), generated with kicad-footprint-generator", ki_fp_filters=C_*
  C4 C5 C6 C7 C8 C9 C10 C13 C14 C15 C18 C19 C20 C21 C22 C23 C24 C25 C27 C28 C29 C30 C31 C32 C33 C38 C39 C42: Description="Unpolarized capacitor, small symbol"
C2 C3 C11 C12 C40 C41: library part C_0603_1608Metric, "Capacitor SMD 0603 (1608 Metric), square (rectangular) end terminal, IPC-7351 nominal, (Body size source: IPC-SM-782 page 76, https://www.pcb-3d.com/wordpress/wp-content/uploads/ipc-sm-782a_amendment_1_and_2.pdf), generated with kicad-footprint-generator", Description="Unpolarized capacitor, small symbol", ki_fp_filters=C_*
C35 C36 C37 C43 C44 C45 C46 C56 C57 C58 C59: library part C_0402_1005Metric, "Capacitor SMD 0402 (1005 Metric), square (rectangular) end terminal, IPC-7351 nominal, (Body size source: IPC-SM-782 page 76, https://www.pcb-3d.com/wordpress/wp-content/uploads/ipc-sm-782a_amendment_1_and_2.pdf)", KiLib_Generator=SMD_2terminal_chip_molded, ki_fp_filters=C_*
C52 C53: library part C_0603_1608Metric_Pad1.08x0.95mm_HandSolder, "Capacitor SMD 0603 (1608 Metric), square (rectangular) end terminal, IPC-7351 nominal with elongated pad for handsoldering. (Body size source: IPC-SM-782 page 76, https://www.pcb-3d.com/wordpress/wp-content/uploads/ipc-sm-782a_amendment_1_and_2.pdf), generated with kicad-footprint-generator", ki_fp_filters=C_*
D1 D4 D7 D10 D11 D12: library part LED_0402_1005Metric, "LED SMD 0402 (1005 Metric), square (rectangular) end terminal, IPC-7351 nominal, (Body size source: http://www.tortai-tech.com/upload/download/2011102023233369053.pdf), generated with kicad-footprint-generator", ki_fp_filters="LED* LED_SMD:* LED_THT:*"
  D1 D4 D10 D11 D12: Description="Light emitting diode", Sim.Pins="1=K 2=A"
D2 D3 D5 D6: library part D_SOD-323_HandSoldering, "SOD-323", Datasheet=https://www.digikey.com/en/products/detail/stmicroelectronics/BAT54JFILM/1037673, ki_fp_filters=D*SOD?323F*
D8 D9: library part LED_SK6812MINI_PLCC4_3.5x3.5mm_P1.75mm, "3.5mm x 3.5mm PLCC4 Addressable RGB LED NeoPixel, https://cdn-shop.adafruit.com/product-files/2686/SK6812MINI_REV.01-1-2.pdf", Datasheet=https://www.digikey.com/en/products/detail/adafruit-industries-llc/2659/5804108, ki_fp_filters=LED*SK6812MINI*PLCC*3.5x3.5mm*P1.75mm*
D13: library part LED_0805_2012Metric_Pad1.15x1.40mm_HandSolder, "LED SMD 0805 (2012 Metric), square (rectangular) end terminal, IPC-7351 nominal, (Body size source: https://docs.google.com/spreadsheets/d/1BsfQQcO9C6DZCsRaXUlFlo91Tg2WpOkGARC1WS5S8t0/edit?usp=sharing)", KiLib_Generator=SMD_2terminal_chip_molded, ki_fp_filters="LED* LED_SMD:* LED_THT:*"
D14: library part D_SOD-323F, "SOD-323F http://www.nxp.com/documents/outline_drawing/SOD323F.pdf", Datasheet=https://assets.nexperia.com/documents/data-sheet/BAT54J.pdf, Description="30V 200mA Schottky diode, SOD-323F", ki_fp_filters=D*SOD?323F*
FB1 FB2 L3: library part L_0603_1608Metric, "Inductor SMD 0603 (1608 Metric), square (rectangular) end terminal, IPC-7351 nominal, (Body size source: http://www.tortai-tech.com/upload/download/2011102023233369053.pdf), generated with kicad-footprint-generator"
  FB1 FB2: Description="Ferrite bead", ki_fp_filters="Inductor_* L_* *Ferrite*"
  L3: Description=Inductor, ki_fp_filters="Choke_* *Coil* Inductor_* L_*"
FID1 FID1: library part riskybird_frame, Description="Fiducial Marker"
G*** G*** G*** G***: library part LOGO
H1 H2 H3 H4: library part MountingHole_2.2mm_M2, "Mounting Hole 2.2mm, M2, no annular, generated by kicad-footprint-generator mountinghole.py", Description="Mounting Hole without connection", ki_fp_filters=MountingHole*
IC1: library part PMW3901MBTXQT, "PMW3901MB-TXQT-2", Manufacturer_Name="PixArt Imaging Inc.", Manufacturer_Part_Number=PMW3901MB-TXQT, Description=PMW3901MB-TXQT, Height=2.36
J1 J8: library part USB_Micro-B_Molex_47346-0001, "Micro USB B receptable with flange, bottom-mount, SMD, right-angle (http://www.molex.com/pdm_docs/sd/473460001_sd.pdf)", ki_fp_filters=USB*
J2 J9 J10 J11: library part PinHeader_1x05_P2.54mm_Vertical, "Through hole straight pin header, 1x05, 2.54mm pitch, single row", Description="Generic connector, single row, 01x05, script generated (kicad-library-utils/schlib/autogen/connector/)", ki_fp_filters=Connector*:*_1x??_*
J3 J4 J5 J6: library part Molex_PicoBlade_53048-0210_1x02_P1.25mm_Horizontal, "Molex PicoBlade Connector System, 53048-0210, 2 Pins per row (http://www.molex.com/pdm_docs/sd/530480210_sd.pdf), generated with kicad-footprint-generator", ki_fp_filters=Connector*:*_1x??_*
J7: library part PinHeader_1x02_P2.00mm_Vertical, "Through hole straight pin header, 1x02, 2.00mm pitch, single row", ki_fp_filters=Connector*:*_1x??_*
J13: library part 5037762410, "503776-2410-1", Description="Generic connectable mounting pin connector, double row, 02x12, odd/even pin numbering scheme (row 1 odd numbers, row 2 even numbers), script generated (kicad-library-utils/schlib/autogen/connector/)", ki_fp_filters=Connector*:*_2x??-1MP*
J18: library part JST_ZH_B5B-ZR_1x05_P1.50mm_Vertical, "JST ZH series connector, B5B-ZR (http://www.jst-mfg.com/product/pdf/eng/eZH.pdf), generated with kicad-footprint-generator", Description="Generic connectable mounting pin connector, single row, 01x05, script generated (kicad-library-utils/schlib/autogen/connector/)", ki_fp_filters=Connector*:*_1x??-1MP*
J19: library part Hirose_FH12-30S-0.5SH_1x30-1MP_P0.50mm_Horizontal, "Hirose FH12, FFC/FPC connector, FH12-30S-0.5SH, 30 Pins per row (https://www.hirose.com/product/en/products/FH12/FH12-24S-0.5SH(55)/), generated with kicad-footprint-generator", Description="Generic connectable mounting pin connector, single row, 01x30, script generated (kicad-library-utils/schlib/autogen/connector/)", ki_fp_filters=Connector*:*_1x??-1MP*
Q1 Q2 Q3 Q4: library part SOT-23, "SOT, 3 Pin (JEDEC TO-236 Var AB https://www.jedec.org/document_search?search_api_views_fulltext=TO-236), generated with kicad-footprint-generator ipc_gullwing_generator.py"
Q8: library part SOT-363_SC-70-6, "SOT, 6 Pin (https://home.jeita.or.jp/tsc/std-pdf/ED-7500A.pdf#page=170, JEDEC MO-203, variant AB, https://www.jedec.org/document_search?search_api_views_fulltext=MO-203)", Datasheet=http://www.onsemi.com/pub_link/Collateral/BC846BDW1T1-D.PDF, KiLib_Generator=package/gullwing, ki_fp_filters=SOT?363*
R1 R2 R3 R5 R12 R13 R14 R15 R16 R17 R18 R19 R20 R22 R23 R26 R27 R28 R29 R30 R31 R32 R33 R34 R37 R38 R41 R42 R43 R44 R45 R46 R47 R48 R49: library part R_0201_0603Metric, "Resistor SMD 0201 (0603 Metric), square (rectangular) end terminal, IPC-7351 nominal, (Body size source: https://www.vishay.com/docs/20052/crcw0201e3.pdf), generated with kicad-footprint-generator", ki_fp_filters=R_*
  R1 R12 R27 R28 R29: Description=Resistor
  R5 R22 R23 R26 R30 R31 R32 R33 R41 R42 R43 R44: Description="Resistor, small symbol"
R4 R6 R7 R8 R9 R10: library part R_0201_0603Metric, "Resistor SMD 0201 (0603 Metric), square (rectangular) end terminal, IPC-7351 nominal, (Body size source: https://www.vishay.com/docs/20052/crcw0201e3.pdf)", KiLib_Generator=SMD_2terminal_chip_molded, ki_fp_filters=R_*
R11 R21 R24 R35 R36 R39 R40 R50 R51 R52 R53 R54 R55 R56 R57: library part R_0402_1005Metric, "Resistor SMD 0402 (1005 Metric), square (rectangular) end terminal, IPC-7351 nominal, (Body size source: IPC-SM-782 page 72, https://www.pcb-3d.com/wordpress/wp-content/uploads/ipc-sm-782a_amendment_1_and_2.pdf)", KiLib_Generator=SMD_2terminal_chip_molded, ki_fp_filters=R_*
R25: library part R_0603_1608Metric, "Resistor SMD 0603 (1608 Metric), square (rectangular) end terminal, IPC-7351 nominal, (Body size source: IPC-SM-782 page 72, https://www.pcb-3d.com/wordpress/wp-content/uploads/ipc-sm-782a_amendment_1_and_2.pdf), generated with kicad-footprint-generator", Description="Resistor, small symbol", ki_fp_filters=R_*
SW1 SW2 SW4: library part SW_SPST_B3U-1000P, "Ultra-small-sized Tactile Switch with High Contact Reliability, Top-actuated Model, without Ground Terminal, without Boss"
  SW2: Description="Single Pole Single Throw (SPST) switch"
SW3: library part SW_SPDT_CK_JS102011SAQN, "Sub-miniature slide switch, right-angle, http://www.ckswitches.com/media/1422/js.pdf"
TP1 TP6: library part TestPoint_Pad_D1.0mm, "SMD pad as test Point, diameter 1.0mm", Description="test point", ki_fp_filters="Pin* Test*"
U1: library part WQFN-16-1EP_3x3mm_P0.5mm_EP1.6x1.6mm, "WQFN, 16 Pin (https://www.ti.com/lit/ds/symlink/tpa6132a2.pdf#page=24), generated with kicad-footprint-generator ipc_noLead_generator.py", Datasheet=https://www.ti.com/lit/gpn/ads7128, ki_fp_filters="WQFN16_RTE_TEX WQFN16_RTE_TEX-M WQFN16_RTE_TEX-L"
U3: library part Bosch_LGA-16_4.5x3mm_P0.5mm_LayoutBorder7x1y_ClockwisePinNumbering, "Bosch  LGA, 16 Pin (https://www.bosch-sensortec.com/media/boschsensortec/downloads/datasheets/bst-bmi088-ds001.pdf#page=55), generated with kicad-footprint-generator ipc_noLead_generator.py", PACKAGE="VFLGA-16 Bosch Sensortec", Description="Accelerometer, Gyroscope, 6 Axis Sensor I²C, SPI Output", MF="Bosch Sensortec", PURCHASE-URL=https://pricing.snapeda.com/search/part/BMI088/?ref=eda, PRICE=None, MP=BMI088, AVAILABILITY="In Stock"
U4: library part SOT-23-5, "SOT, 5 Pin (JEDEC MO-178 Var AA https://www.jedec.org/document_search?search_api_views_fulltext=MO-178), generated with kicad-footprint-generator ipc_gullwing_generator.py", Datasheet=http://ww1.microchip.com/downloads/en/DeviceDoc/20001984g.pdf, ki_fp_filters=SOT?23*
U5: library part BMP390
U6: library part LQFP-64_10x10mm_P0.5mm, "LQFP, 64 Pin (https://www.analog.com/media/en/technical-documentation/data-sheets/ad7606_7606-6_7606-4.pdf), generated with kicad-footprint-generator ipc_gullwing_generator.py", MPN=FT2232HL-REEL, Manufacturer="FTDI, Future Technology Devices International Ltd", Datasheet=https://www.ftdichip.com/Support/Documents/DataSheets/ICs/DS_FT2232H.pdf, Description="IC USB HS DUAL UART/FIFO 64-LQFP", Digi-Key_PN=768-1024-1-ND, Category="Integrated Circuits (ICs)", Family="Interface - Controllers", DK_Datasheet_Link=https://www.ftdichip.com/Support/Documents/DataSheets/ICs/DS_FT2232H.pdf, DK_Detail_Page=/product-detail/en/ftdi-future-technology-devices-international-ltd/FT2232HL-REEL/768-1024-1-ND/1986057, Description_1="IC USB HS DUAL UART/FIFO 64-LQFP", Status=Active
U7: library part TSSOP-8_4.4x3mm_P0.65mm, "TSSOP, 8 Pin (JEDEC MO-153 Var AA https://www.jedec.org/document_search?search_api_views_fulltext=MO-153), generated with kicad-footprint-generator ipc_gullwing_generator.py"
U8: library part SSOP-20_3.9x8.7mm_P0.635mm, "SSOP20: plastic shrink small outline package; 24 leads; body width 3.9 mm; lead pitch 0.635; (see http://www.ftdichip.com/Support/Documents/DataSheets/ICs/DS_FT231X.pdf)", Datasheet=https://www.ftdichip.com/Support/Documents/DataSheets/ICs/DS_FT231X.pdf, ki_fp_filters=*SSOP*3.9x8.7mm*P0.635mm*
U9: library part ST_VL53L1x, "VL53L1x distance sensor", Datasheet=https://www.st.com/resource/en/datasheet/vl53l1x.pdf, Description="4m distance ranging ToF sensor, Optical LGA12", ki_fp_filters=ST*VL53L1x*
U10: library part SOT-353_SC-70-5, "SOT-353, SC-70-5"
U11: library part SOIC-8-1EP_3.9x4.9mm_P1.27mm_EP2.41x3.81mm, "SOIC, 8 Pin (https://www.analog.com/media/en/technical-documentation/data-sheets/ada4898-1_4898-2.pdf#page=29), generated with kicad-footprint-generator ipc_gullwing_generator.py", Datasheet=https://www.ti.com/lit/gpn/tps54331, ki_fp_filters="D8 D8-M D8-L"
U12: library part SOT-23-5, "SOT, 5 Pin (JEDEC MO-178 Var AA https://www.jedec.org/document_search?search_api_views_fulltext=MO-178)", Datasheet=http://www.ti.com/lit/ds/symlink/lp2985.pdf, KiLib_Generator=package/gullwing, ki_fp_filters=SOT?23*
U13: library part TSSOP-8_4.4x3mm_P0.65mm, "TSSOP, 8 Pin (JEDEC MO-153 Var AA https://www.jedec.org/document_search?search_api_views_fulltext=MO-153)", KiLib_Generator=package/gullwing
U14: library part ESP32-C6-MINI-1, "2.4 GHz Wi-Fi, Bluetooth, Zigbee and Thread combo chip, external antenna, https://www.espressif.com/sites/default/files/documentation/esp32-c6-mini-1_mini-1u_datasheet_en.pdf", Datasheet=https://www.espressif.com/sites/default/files/documentation/esp32-c6-mini-1_datasheet_en.pdf
Y1: library part OSC_CSTNE12M0G550000R0, Manufacturer=Murata, MAXIMUM_PACKAGE_HEIGHT=0.8mm, PARTREV=JGC42-8858A, STANDARD="Manufacturer Recomendations"

## Nets (pads, with @x,y where several pads share a name; then routed paths per layer and width w, separated by ;. In a path a pad name is that pad's centre, name@x,y a point inside that pad or via, vN(x,y) a via of type N, cw(c..) or ccw(c..) an arc to the next point about the centre after c; other vN are vias at no path point)
pads on no net: C1.1 C1.2 C1.Un1 C1.Un2 C2.1 C2.2 C3.1 C3.2 C4.1 C4.2 C4.Un1 C4.Un2 C5.1 C5.2 C5.Un1 C5.Un2 C6.1 C6.2 C6.Un1 C6.Un2 C7.1 C7.2 C7.Un1 C7.Un2 C8.1 C8.2 C8.Un1 C8.Un2 C9.1 C9.2 C9.Un1 C9.Un2 C10.1 C10.2 C10.Un1 C10.Un2 C11.1 C11.2 C12.1 C12.2 C13.1 C13.2 C13.Un1 C13.Un2 C14.1 C14.2 C14.Un1 C14.Un2 C15.1 C15.2 C15.Un1 C15.Un2 C16.1 C16.2 C16.Un1 C16.Un2 C17.1 C17.2 C17.Un1 C17.Un2 C18.1 C18.2 C18.Un1 C18.Un2 C19.1 C19.2 C19.Un1 C19.Un2 C20.1 C20.2 C20.Un1 C20.Un2 C21.1 C21.2 C21.Un1 C21.Un2 C22.1 C22.2 C22.Un1 C22.Un2 C23.1 C23.2 C23.Un1 C23.Un2 C24.1 C24.2 C24.Un1 C24.Un2 C25.1 C25.2 C25.Un1 C25.Un2 C26.1 C26.2 C26.Un1 C26.Un2 C27.1 C27.2 C27.Un1 C27.Un2 C28.1 C28.2 C28.Un1 C28.Un2 C29.1 C29.2 C29.Un1 C29.Un2 C30.1 C30.2 C30.Un1 C30.Un2 C31.1 C31.2 C31.Un1 C31.Un2 C32.1 C32.2 C32.Un1 C32.Un2 C33.1 C33.2 C33.Un1 C33.Un2 C34.1 C34.2 C34.Un1 C34.Un2 C35.1 C35.2 C36.1 C36.2 C37.1 C37.2 C38.1 C38.2 C38.Un1 C38.Un2 C39.1 C39.2 C39.Un1 C39.Un2 C40.1 C40.2 C41.1 C41.2 C42.1 C42.2 C42.Un1 C42.Un2 C43.1 C43.2 C44.1 C44.2 C45.1 C45.2 C46.1 C46.2 C47.1 C47.2 C47.Un1 C47.Un2 C48.1 C48.2 C48.Un1 C48.Un2 C49.1 C49.2 C49.Un1 C49.Un2 C50.1 C50.2 C50.Un1 C50.Un2 C51.1 C51.2 C51.Un1 C51.Un2 C52.1 C52.2 C53.1 C53.2 C54.1 C54.2 C54.Un1 C54.Un2 C55.1 C55.2 C55.Un1 C55.Un2 C56.1 C56.2 C57.1 C57.2 C58.1 C58.2 C59.1 C59.2 D1.1 D1.2 D2.1 D2.2 D3.1 D3.2 D4.1 D4.2 D5.1 D5.2 D6.1 D6.2 D7.1 D7.2 D8.1 D8.2 D8.3 D8.4 D9.1 D9.2 D9.3 D9.4 D10.1 D10.2 D11.1 D11.2 D12.1 D12.2 D13.1 D13.2 D14.1 D14.2 FB1.1 FB1.2 FB2.1 FB2.2 H1.Un1 H2.Un1 H3.Un1 H4.Un1 IC1.1 IC1.2 IC1.3 IC1.4 IC1.5 IC1.6 IC1.7 IC1.8 IC1.9 IC1.10 IC1.11 IC1.12 IC1.13 IC1.14 IC1.15 IC1.16 IC1.17 IC1.18 IC1.19 IC1.20 IC1.21 IC1.22 IC1.23 IC1.24 IC1.25 IC1.26 IC1.27 IC1.28 IC1.29 J1.1 J1.2 J1.3 J1.4 J1.5 J1.SH J2.1 J2.2 J2.3 J2.4 J2.5 J3.1 J3.2 J4.1 J4.2 J5.1 J5.2 J6.1 J6.2 J7.1 J7.2 J8.1 J8.2 J8.3 J8.4 J8.5 J8.6 J9.1 J9.2 J9.3 J9.4 J9.5 J10.1 J10.2 J10.3 J10.4 J10.5 J11.1 J11.2 J11.3 J11.4 J11.5 J13.1 J13.2 J13.3 J13.4 J13.5 J13.6 J13.7 J13.8 J13.9 J13.10 J13.11 J13.12 J13.13 J13.14 J13.15 J13.16 J13.17 J13.18 J13.19 J13.20 J13.21 J13.22 J13.23 J13.24 J13.MP1 J13.MP2 J13.MP3 J13.MP4 J18.1 J18.2 J18.3 J18.4 J18.5 J19.1 J19.2 J19.3 J19.4 J19.5 J19.6 J19.7 J19.8 J19.9 J19.10 J19.11 J19.12 J19.13 J19.14 J19.15 J19.16 J19.17 J19.18 J19.19 J19.20 J19.21 J19.22 J19.23 J19.24 J19.25 J19.26 J19.27 J19.28 J19.29 J19.30 J19.MP L3.1 L3.2 Q1.1 Q1.2 Q1.3 Q2.1 Q2.2 Q2.3 Q3.1 Q3.2 Q3.3 Q4.1 Q4.2 Q4.3 Q8.1 Q8.2 Q8.3 Q8.4 Q8.5 Q8.6 R1.1 R1.2 R1.Un1 R1.Un2 R2.1 R2.2 R2.Un1 R2.Un2 R3.1 R3.2 R3.Un1 R3.Un2 R4.1 R4.2 R4.Un1 R4.Un2 R5.1 R5.2 R5.Un1 R5.Un2 R6.1 R6.2 R6.Un1 R6.Un2 R7.1 R7.2 R7.Un1 R7.Un2 R8.1 R8.2 R8.Un1 R8.Un2 R9.1 R9.2 R9.Un1 R9.Un2 R10.1 R10.2 R10.Un1 R10.Un2 R11.1 R11.2 R12.1 R12.2 R12.Un1 R12.Un2 R13.1 R13.2 R13.Un1 R13.Un2 R14.1 R14.2 R14.Un1 R14.Un2 R15.1 R15.2 R15.Un1 R15.Un2 R16.1 R16.2 R16.Un1 R16.Un2 R17.1 R17.2 R17.Un1 R17.Un2 R18.1 R18.2 R18.Un1 R18.Un2 R19.1 R19.2 R19.Un1 R19.Un2 R20.1 R20.2 R20.Un1 R20.Un2 R21.1 R21.2 R22.1 R22.2 R22.Un1 R22.Un2 R23.1 R23.2 R23.Un1 R23.Un2 R24.1 R24.2 R25.1 R25.2 R26.1 R26.2 R26.Un1 R26.Un2 R27.1 R27.2 R27.Un1 R27.Un2 R28.1 R28.2 R28.Un1 R28.Un2 R29.1 R29.2 R29.Un1 R29.Un2 R30.1 R30.2 R30.Un1 R30.Un2 R31.1 R31.2 R31.Un1 R31.Un2 R32.1 R32.2 R32.Un1 R32.Un2 R33.1 R33.2 R33.Un1 R33.Un2 R34.1 R34.2 R34.Un1 R34.Un2 R35.1 R35.2 R36.1 R36.2 R37.1 R37.2 R37.Un1 R37.Un2 R38.1 R38.2 R38.Un1 R38.Un2 R39.1 R39.2 R40.1 R40.2 R41.1 R41.2 R41.Un1 R41.Un2 R42.1 R42.2 R42.Un1 R42.Un2 R43.1 R43.2 R43.Un1 R43.Un2 R44.1 R44.2 R44.Un1 R44.Un2 R45.1 R45.2 R45.Un1 R45.Un2 R46.1 R46.2 R46.Un1 R46.Un2 R47.1 R47.2 R47.Un1 R47.Un2 R48.1 R48.2 R48.Un1 R48.Un2 R49.1 R49.2 R49.Un1 R49.Un2 R50.1 R50.2 R51.1 R51.2 R52.1 R52.2 R53.1 R53.2 R54.1 R54.2 R55.1 R55.2 R56.1 R56.2 R57.1 R57.2 SW1.1 SW1.2 SW2.1 SW2.2 SW3.1 SW3.2 SW3.3 SW3.Un1 SW3.Un2 SW4.1 SW4.2 TP1.1 TP6.1 U1.1 U1.2 U1.3 U1.4 U1.5 U1.6 U1.7 U1.8 U1.9 U1.10 U1.11 U1.12 U1.13 U1.14 U1.15 U1.16 U1.17 U1.Un1 U1.Un2 U1.Un3 U1.Un4 U3.1 U3.2 U3.3 U3.4 U3.5 U3.6 U3.7 U3.8 U3.9 U3.10 U3.11 U3.12 U3.13 U3.14 U3.15 U3.16 U4.1 U4.2 U4.3 U4.4 U4.5 U5.1 U5.2 U5.3 U5.4 U5.5 U5.6 U5.7 U5.8 U5.9 U5.10 U6.1 U6.2 U6.3 U6.4 U6.5 U6.6 U6.7 U6.8 U6.9 U6.10 U6.11 U6.12 U6.13 U6.14 U6.15 U6.16 U6.17 U6.18 U6.19 U6.20 U6.21 U6.22 U6.23 U6.24 U6.25 U6.26 U6.27 U6.28 U6.29 U6.30 U6.31 U6.32 U6.33 U6.34 U6.35 U6.36 U6.37 U6.38 U6.39 U6.40 U6.41 U6.42 U6.43 U6.44 U6.45 U6.46 U6.47 U6.48 U6.49 U6.50 U6.51 U6.52 U6.53 U6.54 U6.55 U6.56 U6.57 U6.58 U6.59 U6.60 U6.61 U6.62 U6.63 U6.64 U7.1 U7.2 U7.3 U7.4 U7.5 U7.6 U7.7 U7.8 U8.1 U8.2 U8.3 U8.4 U8.5 U8.6 U8.7 U8.8 U8.9 U8.10 U8.11 U8.12 U8.13 U8.14 U8.15 U8.16 U8.17 U8.18 U8.19 U8.20 U9.1 U9.2 U9.3 U9.4 U9.5 U9.6 U9.7 U9.8 U9.9 U9.10 U9.11 U9.12 U10.1 U10.2 U10.3 U10.4 U10.5 U11.1 U11.2 U11.3 U11.4 U11.5 U11.6 U11.7 U11.8 U11.9 U11.Un1 U11.Un2 U11.Un3 U11.Un4 U12.1 U12.2 U12.3 U12.4 U12.5 U13.1 U13.2 U13.3 U13.4 U13.5 U13.6 U13.7 U13.8 U14.1 U14.2 U14.3 U14.4 U14.5 U14.6 U14.7 U14.8 U14.9 U14.10 U14.11 U14.12 U14.13 U14.14 U14.15 U14.16 U14.17 U14.18 U14.19 U14.20 U14.21 U14.22 U14.23 U14.24 U14.25 U14.26 U14.27 U14.28 U14.29 U14.30 U14.31 U14.32 U14.33 U14.34 U14.35 U14.36 U14.37 U14.38 U14.39 U14.40 U14.41 U14.42 U14.43 U14.44 U14.45 U14.46 U14.47 U14.48 U14.49 U14.50 U14.51 U14.52 U14.53 Y1.1 Y1.2 Y1.3

## Silkscreen, mask and mechanical layers (free items; w line width, h text height)
F.SilkS:
  region: 127.109,25.683 126.613,25.276 126.613,25.277 126.375,25.9
  region: 127.036,81.3 126.302,81.083 126.54,81.705 126.541,81.707
  region: 73.459,81.676 73.698,81.053 72.963,81.271 73.459,81.677
  region: 73.361,25.277 73.361,25.276 72.866,25.683 73.6,25.9
  lines w0.254: 71.902,26.973 cw(c71.502,25.173) 73.302,25.573 ; 71.999,79.98 ccw(c71.599,81.78) 73.399,81.38 ; 126.6,81.41 ccw(c128.4,81.81) 128,80.01 ; 126.673,25.573 cw(c128.473,25.173) 128.073,26.973
  text "MOTOR 3" at 73.552,79.652 h0.75 r135
  text "MOTOR 4" at 123.151,75.749 h0.75 r45
  text "BATT" at 102,67.706 h0.7
  text "GND" at 99.2,67.702 h0.7
  text "3V3" at 105.2,67.702 h0.7
  text "RX" at 82.8,65.961 h0.5
  text "TX" at 84.8,64.561 h0.5
  text "JTAG" at 81.782,64.3 h0.5 r90
  text "SDA" at 87.8,56.558 h0.5
  text "SCL" at 87.8,53.958 h0.5
  text "+" at 80.6,43.504 h1
  text "-" at 85.6,42.465 h1
  text "CHG" at 82.2,39.558 h0.5
  text "MOTOR 2" at 77.351,31.149 h0.75 r45
  text "MOTOR 1" at 126.751,27.651 h0.75 r135
B.SilkS:
  text "3V3" at 117.4,62.102 h0.7
  text "V2" at 114.884,46.9 h1 r90
  text "BATT" at 117.6,43.706 h0.7
Cmts.User:
  circle w0.254: c131,22.5 r22.5
  circle w0.254: c131,84.5 r22.5
  circle w0.254: c69,22.5 r22.5
  circle w0.254: c69,84.5 r22.5
  lines w0.254: 55.961,53.5 144.461,53.5 ; 100,11.25 100,99.75

## Dimensions
128.5,82 to 131,84.5 on Cmts.User
121.5,43.5 to 121.5,63.5 on Cmts.User

## Text inside footprints (layer, text, board x,y; h text height)
D8: F.SilkS "1" at 237.877,94.419 h0.8
D9: F.SilkS "1" at 237.877,89.299 h0.8
J1: Dwgs.User "PCB Edge" at 226.333,90.327 h0.4
J8: Dwgs.User "PCB Edge" at 80.183,58.903 h0.4 r90
U14: Cmts.User "Antenna" at 226.056,110.091 h1; Cmts.User "Keepout Area" at 225.424,117.682 h1